# EAGLE board MotorTest (EAGLE 8.3.1)
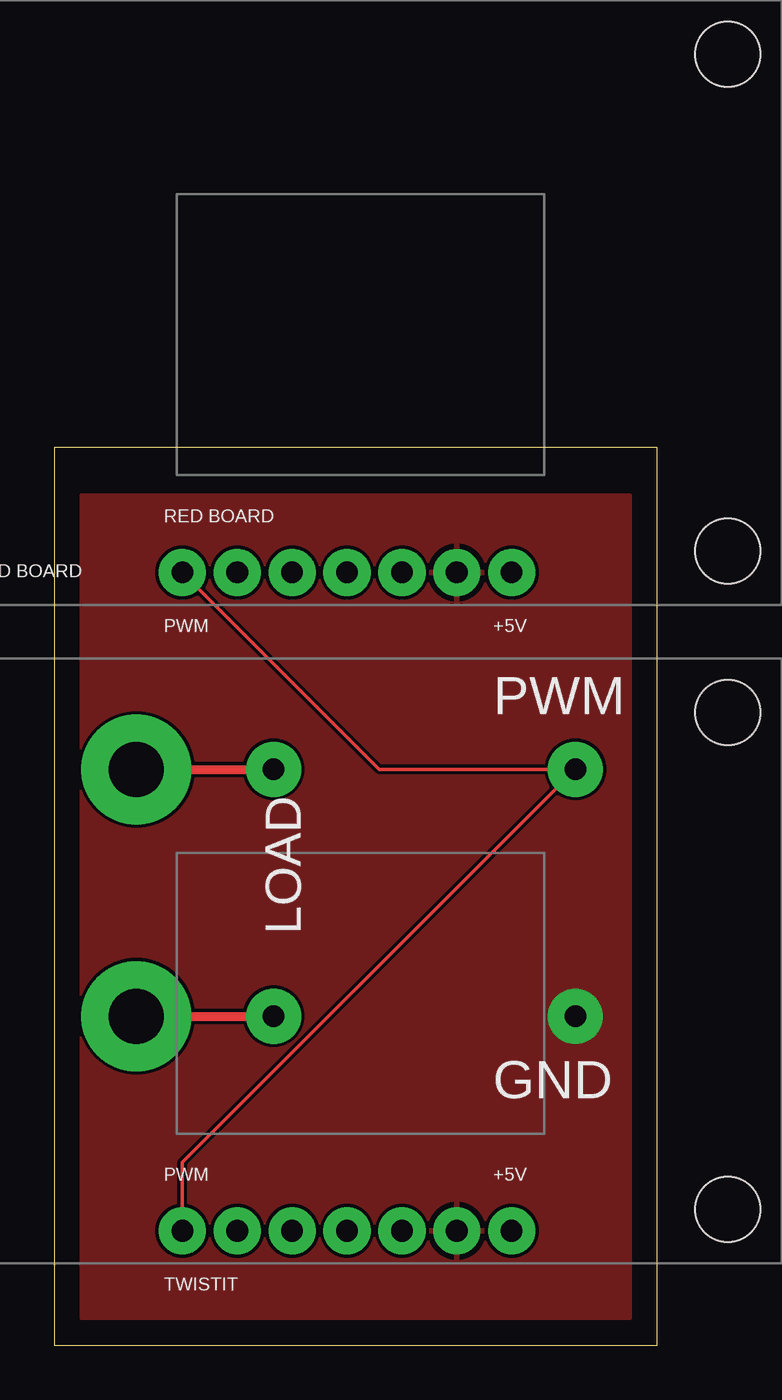
[diagram p0: board, top side]
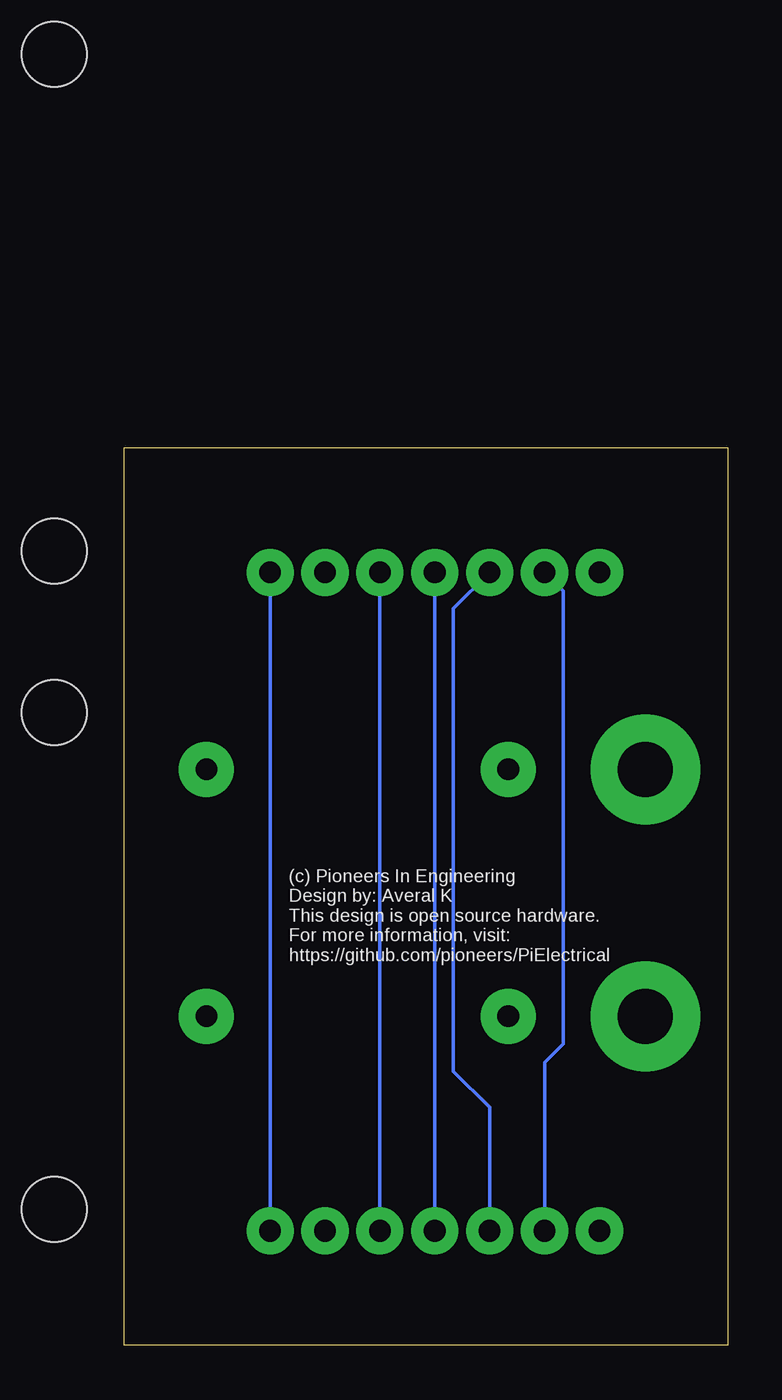
[diagram p1: board, bottom side, seen from below]

Size 27.92 x 41.58 mm. Coordinates in mm from the lower left corner, seen from the top.
Outline: 0,0 27.92,0 27.92,41.58 0,41.58 0,0
Copper layers (1*16): Top 2mil / dielectric 9mil / Bottom 2mil
Design rules "pie": minimum track width 6mil, minimum drill 15mil, track to track 6mil, track to pad 6mil, pad to pad 6mil, via to via 6mil, smd to smd 6mil, copper to edge 25mil, drill to drill 7mil, minimum pad ring 7mil, minimum via ring 7mil, stop-mask expansion 3mil, vias tented up to drill 21mil, thermal gap 10mil

## Footprints (pad centres in the part's own frame; a part is rotated, then mirrored left to right if it is on the bottom)
VNH2SP30_MOTOR_CONTROLLER = drill 1 pad 2.184: +5V 41.5,1.5; CS 33.88,1.5; EN 36.42,1.5; GND 38.96,1.5; INA 31.34,1.5; INB 28.8,1.5; PMW 26.26,1.5 | hole 3: 51.5,2.5; 51.5,25.5

## Placement (x,y rotation side)
BR1  VNH2SP30_MOTOR_CONTROLLER  [VNH2SP30_MOTOR_CONTROLLER]  -20.32,3.81 0 top
BR2  VNH2SP30_MOTOR_CONTROLLER  [VNH2SP30_MOTOR_CONTROLLER]  -20.32,34.29 0 top

## Library data of the parts
BR1 BR2 = pie

## Nets
+5V: BR1.+5V BR2.+5V
CS: BR1.CS BR2.CS
EN: BR1.EN BR2.EN
HIGH: BR1.GND BR2.GND
INA: BR1.INA BR2.INA
INB: BR1.INB BR2.INB
PWM: BR1.PMW BR2.PMW

## Tracks (layer width: path | path; a pad name or v marks a point on that pad's centre or on a via)
+5V
  Bottom 0.152: BR1.+5V BR2.+5V
CS
  Bottom 0.152: BR1.CS BR2.CS
EN
  Bottom 0.152: BR1.EN BR2.EN
HI  (via drill 1 pad 2.54, 2.54 pad 5.08)
  Top 0.406: v3.81,26.67 v10.16,26.67
HIGH  (via drill 1 pad 2.54)
  other vias: 24.13,15.24
  pour Top: 1.27,39.37 26.67,39.37 26.67,1.27 1.27,1.27
INA
  Bottom 0.152: BR1.INA 11.02,11.02 12.7,12.7 12.7,34.11 BR2.INA
INB
  Bottom 0.152: BR2.INB 7.62,34.93 7.62,13.97 8.48,13.11 BR1.INB
LO  (via drill 1 pad 2.54, 2.54 pad 5.08)
  Top 0.406: v3.81,15.24 v10.16,15.24
PWM  (via drill 1 pad 2.54)
  Top 0.152: BR1.PMW 5.94,8.48 v24.13,26.67 15.06,26.67 BR2.PMW

## Text on the board
tPlace: RED BOARD | RED BOARD | PWM | +5V | PWM | LOAD | GND | PWM | +5V | TWISTIT
bPlace: (c) Pioneers In Engineering / Design by: Averal K / This design is open source hardware. / For more information, visit: / https://github.com/pioneers/PiElectrical